# EAGLE board CT_schematic (EAGLE 7.6.0)

Size 100 x 80 mm. Coordinates in mm from the lower left corner, seen from the top.
Outline: 0,0 100,0 100,80 0,80 0,0
Copper layers (1*16): Top 0.035mm / dielectric 1.5mm / Bottom 0.035mm
Design rules "default": minimum track width 10mil, minimum drill 24mil, track to track 8mil, track to pad 8mil, pad to pad 8mil, via to via 8mil, smd to smd 8mil, copper to edge 40mil, drill to drill 8mil, minimum pad ring 10mil, minimum via ring 8mil, stop-mask expansion 4mil, vias tented up to drill 0mil, thermal gap 10mil

## Footprints (pad centres in the part's own frame; a part is rotated, then mirrored left to right if it is on the bottom)
C0603 = smd 0.8 x 0.8: 1 -0.762,0; 2 0.762,0
C0402 = smd 0.5 x 0.5: 1 -0.508,0; 2 0.508,0
C0805 = smd 1.2 x 1.3: 1 -1.016,0; 2 1.016,0
2220 = smd 1.85 x 5.5: 1 -2.55,0; 2 2.55,0
EXV-9H = smd 3.505 x 1.676: 1 -2.857,0; 2 2.857,0
L0603 = smd 0.8 x 0.8: 1 -0.762,0; 2 0.762,0
DR1040 = smd 1.6 x 3.2: 1 -4.458,0; 2 4.458,0
PJ-037B_PACKAGE = drill 3.7 square: 1 12,0 | drill 3.2 square: 2 6,0
R0603 = smd 0.8 x 0.8: 1 -0.762,0; 2 0.762,0
LQFP176 = smd 0.3 x 1.2: 1 -10.75,-12.75; 2 -10.25,-12.75; 3 -9.75,-12.75; 4 -9.25,-12.75; 5 -8.75,-12.75; 6 -8.25,-12.75; 7 -7.75,-12.75; 8 -7.25,-12.75; 9 -6.75,-12.75; 10 -6.25,-12.75; 11 -5.75,-12.75; 12 -5.25,-12.75; 13 -4.75,-12.75; 14 -4.25,-12.75; 15 -3.75,-12.75; 16 -3.25,-12.75; 17 -2.75,-12.75; 18 -2.25,-12.75; 19 -1.75,-12.75; 20 -1.25,-12.75; 21 -0.75,-12.75; 22 -0.25,-12.75; 23 0.25,-12.75; 24 0.75,-12.75; 25 1.25,-12.75; 26 1.75,-12.75; 27 2.25,-12.75; 28 2.75,-12.75; 29 3.25,-12.75; 30 3.75,-12.75; 31 4.25,-12.75; 32 4.75,-12.75; 33 5.25,-12.75; 34 5.75,-12.75; 35 6.25,-12.75; 36 6.75,-12.75; 37 7.25,-12.75; 38 7.75,-12.75; 39 8.25,-12.75; 40 8.75,-12.75; 41 9.25,-12.75; 42 9.75,-12.75; 43 10.25,-12.75; 44 10.75,-12.75; 89 10.75,12.75; 90 10.25,12.75; 91 9.75,12.75; 92 9.25,12.75; 93 8.75,12.75; 94 8.25,12.75; 95 7.75,12.75; 96 7.25,12.75; 97 6.75,12.75; 98 6.25,12.75; 99 5.75,12.75; 100 5.25,12.75; 101 4.75,12.75; 102 4.25,12.75; 103 3.75,12.75; 104 3.25,12.75; 105 2.75,12.75; 106 2.25,12.75; 107 1.75,12.75; 108 1.25,12.75; 109 0.75,12.75; 110 0.25,12.75; 111 -0.25,12.75; 112 -0.75,12.75; 113 -1.25,12.75; 114 -1.75,12.75; 115 -2.25,12.75; 116 -2.75,12.75; 117 -3.25,12.75; 118 -3.75,12.75; 119 -4.25,12.75; 120 -4.75,12.75; 121 -5.25,12.75; 122 -5.75,12.75; 123 -6.25,12.75; 124 -6.75,12.75; 125 -7.25,12.75; 126 -7.75,12.75; 127 -8.25,12.75; 128 -8.75,12.75; 129 -9.25,12.75; 130 -9.75,12.75; 131 -10.25,12.75; 132 -10.75,12.75 | smd 1.2 x 0.3: 45 12.75,-10.75; 46 12.75,-10.25; 47 12.75,-9.75; 48 12.75,-9.25; 49 12.75,-8.75; 50 12.75,-8.25; 51 12.75,-7.75; 52 12.75,-7.25; 53 12.75,-6.75; 54 12.75,-6.25; 55 12.75,-5.75; 56 12.75,-5.25; 57 12.75,-4.75; 58 12.75,-4.25; 59 12.75,-3.75; 60 12.75,-3.25; 61 12.75,-2.75; 62 12.75,-2.25; 63 12.75,-1.75; 64 12.75,-1.25; 65 12.75,-0.75; 66 12.75,-0.25; 67 12.75,0.25; 68 12.75,0.75; 69 12.75,1.25; 70 12.75,1.75; 71 12.75,2.25; 72 12.75,2.75; 73 12.75,3.25; 74 12.75,3.75; 75 12.75,4.25; 76 12.75,4.75; 77 12.75,5.25; 78 12.75,5.75; 79 12.75,6.25; 80 12.75,6.75; 81 12.75,7.25; 82 12.75,7.75; 83 12.75,8.25; 84 12.75,8.75; 85 12.75,9.25; 86 12.75,9.75; 87 12.75,10.25; 88 12.75,10.75; 133 -12.75,10.75; 134 -12.75,10.25; 135 -12.75,9.75; 136 -12.75,9.25; 137 -12.75,8.75; 138 -12.75,8.25; 139 -12.75,7.75; 140 -12.75,7.25; 141 -12.75,6.75; 142 -12.75,6.25; 143 -12.75,5.75; 144 -12.75,5.25; 145 -12.75,4.75; 146 -12.75,4.25; 147 -12.75,3.75; 148 -12.75,3.25; 149 -12.75,2.75; 150 -12.75,2.25; 151 -12.75,1.75; 152 -12.75,1.25; 153 -12.75,0.75; 154 -12.75,0.25; 155 -12.75,-0.25; 156 -12.75,-0.75; 157 -12.75,-1.25; 158 -12.75,-1.75; 159 -12.75,-2.25; 160 -12.75,-2.75; 161 -12.75,-3.25; 162 -12.75,-3.75; 163 -12.75,-4.25; 164 -12.75,-4.75; 165 -12.75,-5.25; 166 -12.75,-5.75; 167 -12.75,-6.25; 168 -12.75,-6.75; 169 -12.75,-7.25; 170 -12.75,-7.75; 171 -12.75,-8.25; 172 -12.75,-8.75; 173 -12.75,-9.25; 174 -12.75,-9.75; 175 -12.75,-10.25; 176 -12.75,-10.75
SAMTEC_FTSH-105-01-L-DV-K = smd 0.762 x 2.794: 1 -2.54,-2.032; 2 -2.54,2.032; 3 -1.27,-2.032; 4 -1.27,2.032; 5 0,-2.032; 6 0,2.032; 7 1.27,-2.032; 8 1.27,2.032; 9 2.54,-2.032; 10 2.54,2.032
DFN8-S = smd 0.6 x 0.4: 1 -2.69,1.905; 2 -2.69,0.635; 3 -2.69,-0.635; 4 -2.69,-1.905; 5 2.69,-1.905; 6 2.69,-0.635; 7 2.69,0.635; 8 2.69,1.905
ABLS-25.000MHZ-B2F-T = smd 5.6 x 2.8: 1 -3.81,0; 2 5.69,0
ASEK = smd 1.4 x 1: 1 -1.1,-0.8; 2 1.1,-0.8; 3 1.1,0.8; 4 -1.1,0.8
QFN-16_EP = smd 0.805 x 0.3: 1 -1.452,0.75; 2 -1.452,0.25; 3 -1.452,-0.25; 4 -1.452,-0.75; 9 1.452,-0.75; 10 1.452,-0.25; 11 1.452,0.25; 12 1.452,0.75 | smd 0.3 x 0.805: 5 -0.75,-1.452; 6 -0.25,-1.452; 7 0.25,-1.452; 8 0.75,-1.452; 13 0.75,1.452; 14 0.25,1.452; 15 -0.25,1.452; 16 -0.75,1.452 | smd 1.55 x 1.55: 17 0,0
SON-6 = smd 0.55 x 0.3: 1 -0.355,0.5 | smd 0.52 x 0.3: 2 -0.37,0; 3 -0.37,-0.5; 4 0.37,-0.5; 5 0.37,0; 6 0.37,0.5
SW_4-1437565-2 = smd 1.4 x 2.1: 1 -2.23,4.55; 2 -2.23,-4.55; 3 2.23,4.55; 4 2.23,-4.55
LGM67K-G1J2-24-Z = smd 0.8 x 1.4: A -2,0; C 0,0
NC7SZ125M5X = smd 1.3 x 0.7: 1 -1.3,0.95; 2 -1.3,0; 3 -1.3,-0.95; 4 1.3,-0.95; 5 1.3,0.95

## Placement (x,y rotation side)
C1  1e-06  [C0603]  -40.64,66.04 0 top  (outside the outline)
C2  1e-07  [C0603]  -44.45,66.04 0 top  (outside the outline)
C3  1e-07  [C0603]  -48.26,66.04 0 top  (outside the outline)
C4  1e-07  [C0603]  -52.07,66.04 0 top  (outside the outline)
C5  1e-07  [C0603]  -55.88,66.04 0 top  (outside the outline)
C6  1e-07  [C0603]  -59.69,66.04 0 top  (outside the outline)
C7  1e-07  [C0603]  -63.5,66.04 0 top  (outside the outline)
C8  1e-07  [C0603]  -67.31,66.04 0 top  (outside the outline)
C9  1e-07  [C0603]  -71.12,66.04 0 top  (outside the outline)
C10  1e-07  [C0603]  -15.24,71.12 0 top  (outside the outline)
C11  1e-07  [C0603]  -19.05,71.12 0 top  (outside the outline)
C12  1e-07  [C0603]  -22.86,71.12 0 top  (outside the outline)
C13  1e-07  [C0603]  -26.67,71.12 0 top  (outside the outline)
C14  1e-07  [C0603]  -30.48,71.12 0 top  (outside the outline)
C15  1e-07  [C0603]  -34.29,71.12 0 top  (outside the outline)
C16  1e-07  [C0603]  -38.1,71.12 0 top  (outside the outline)
C17  1e-07  [C0603]  -41.91,71.12 0 top  (outside the outline)
C18  4.7e-06  [C0603]  -29.21,66.04 0 top  (outside the outline)
C19  1e-07  [C0603]  -45.72,71.12 0 top  (outside the outline)
C20  1e-08  [C0603]  -49.53,71.12 0 top  (outside the outline)
C21  1e-06  [C0603]  -53.34,71.12 0 top  (outside the outline)
C22  1e-07  [C0603]  -57.15,71.12 0 top  (outside the outline)
C23  2.2e-06  [C0603]  -33.02,66.04 0 top  (outside the outline)
C24  2.2e-06  [C0603]  -36.83,66.04 0 top  (outside the outline)
C25  1e-11  [C0402]  -38.1,76.2 0 top  (outside the outline)
C26  1e-11  [C0402]  -41.91,76.2 0 top  (outside the outline)
C27  1e-07  [C0402]  -45.72,76.2 0 top  (outside the outline)
C28  1e-08  [C0402]  -49.53,76.2 0 top  (outside the outline)
C29  1e-08  [C0402]  -53.34,76.2 0 top  (outside the outline)
C30  1e-05  [C0805]  -62.23,53.34 0 top  (outside the outline)
C31  1e-06  [C0603]  -60.96,71.12 0 top  (outside the outline)
C32  1e-07  [C0402]  -57.15,76.2 0 top  (outside the outline)
C33  6.8e-05  [2220]  -16.51,45.72 0 top  (outside the outline)
C34  1e-07  [C0402]  -60.96,76.2 0 top  (outside the outline)
C35  0.0001  [EXV-9H]  -45.72,45.72 0 top  (outside the outline)
C36  0.0001  [EXV-9H]  -57.15,45.72 0 top  (outside the outline)
C37  1e-08  [C0402]  -64.77,76.2 0 top  (outside the outline)
C38  1e-08  [C0402]  -68.58,76.2 0 top  (outside the outline)
F1  240.0  [L0603]  -64.77,71.12 0 top  (outside the outline)
I1  5.2e-06  [DR1040]  -54.61,33.02 0 top  (outside the outline)
J1  PJ-037B  [PJ-037B_PACKAGE]  -27.94,34.29 0 top  (outside the outline)
R2  1000.0  [R0603]  -68.58,71.12 0 top  (outside the outline)
R7  4700.0  [R0603]  -72.39,71.12 0 top  (outside the outline)
R8  2200.0  [R0603]  -15.24,76.2 0 top  (outside the outline)
R10  2200.0  [R0603]  -19.05,76.2 0 top  (outside the outline)
R12  10000.0  [R0603]  -20.32,60.96 0 top  (outside the outline)
R13  10000.0  [R0603]  -25.4,60.96 0 top  (outside the outline)
R14  10000.0  [R0603]  -30.48,60.96 0 top  (outside the outline)
R15  10000.0  [R0603]  -35.56,60.96 0 top  (outside the outline)
R16  10000.0  [R0603]  -40.64,60.96 0 top  (outside the outline)
R17  10000.0  [R0603]  -45.72,60.96 0 top  (outside the outline)
R18  10000.0  [R0603]  -50.8,60.96 0 top  (outside the outline)
R19  5.0  [R0603]  -22.86,76.2 0 top  (outside the outline)
R20  10000.0  [R0603]  -55.88,60.96 0 top  (outside the outline)
R21  10000.0  [R0603]  -60.96,60.96 0 top  (outside the outline)
R22  10000.0  [R0603]  -66.04,60.96 0 top  (outside the outline)
R23  20000.0  [R0603]  -71.12,60.96 0 top  (outside the outline)
R24  91000.0  [R0603]  -15.24,66.04 0 top  (outside the outline)
R25  300000.0  [R0603]  -67.31,52.07 0 top  (outside the outline)
R26  10000.0  [R0603]  -20.32,66.04 0 top  (outside the outline)
R27  10000.0  [R0603]  -25.4,66.04 0 top  (outside the outline)
R28  9100.0  [R0603]  -26.67,76.2 0 top  (outside the outline)
R29  680000.0  [R0603]  -72.39,52.07 0 top  (outside the outline)
R30  120000.0  [R0603]  -15.24,60.96 0 top  (outside the outline)
U1  STM32F767IGT6  [LQFP176]  -26.67,13.97 0 top  (outside the outline)
U2  FTSH-105-01-L-DV-K  [SAMTEC_FTSH-105-01-L-DV-K]  -63.5,7.62 0 top  (outside the outline)
U3  24AA512-I/MF  [DFN8-S]  -69.85,33.02 0 top  (outside the outline)
U4  ABLS-25.000MHZ-B2F-T  [ABLS-25.000MHZ-B2F-T]  -26.67,54.61 0 top  (outside the outline)
U5  ASEK-32.768KHz-ECST  [ASEK]  -36.83,45.72 0 top  (outside the outline)
U6  LTC3601EUD#PBF  [QFN-16_EP]  -31.75,76.2 0 top  (outside the outline)
U7  TPS3895ADRYR  [SON-6]  -71.12,74.93 0 top  (outside the outline)
U8  4-1437565-2  [SW_4-1437565-2]  -44.45,34.29 0 top  (outside the outline)
U9  Q65110A2395  [LGM67K-G1J2-24-Z]  -38.1,53.34 0 top  (outside the outline)
U10  nc7sz125m5x  [NC7SZ125M5X]  -49.53,52.07 0 top  (outside the outline)
U11  nc7sz125m5x  [NC7SZ125M5X]  -55.88,52.07 0 top  (outside the outline)

## Library data of the parts
C1-C38 F1 I1 J1 R2 R7 R8 R10 R12-R30 U1-U11 = circuit_tree

## Nets
CLK_CRYSTAL_U1_29: C25.1 U1.29 U4.1
CLK_CRYSTAL_U1_30: C26.1 U1.30 U4.2
CLK_U1_9: U1.9 U5.3
GND: C1.2 C2.2 C3.2 C4.2 C5.2 C6.2 C7.2 C8.2 C9.2 C10.2 C11.2 C12.2 C13.2 C14.2 C15.2 C16.2 C17.2 C18.2 C19.2 C20.2 C21.2 C22.2 C23.2 C24.2 C25.2 C26.2 C27.2 C28.2 C29.2 C30.2 C31.2 C33.1 C33.2 C34.2 C35.2 C36.2 C37.2 C38.2 J1.2 R2.2 R12.2 R14.2 R18.2 R19.2 R21.2 R23.2 R25.2 R28.2 R30.2 U1.14 U1.22 U1.37 U1.61 U1.71 U1.90 U1.102 U1.113 U1.126 U1.135 U1.148 U1.158 U2.3 U2.5 U3.4 U3.7 U5.2 U6.1 U6.9 U6.17 U7.2 U9.C U10.2 U10.3 U11.1 U11.3
NET_U1_31: R7.1 U1.31 U11.4
NET_U1_39: C20.1 C21.1 F1.1 U1.38 U1.39
NET_U1_48: R14.1 U1.48
NET_U1_81: C23.1 U1.81
NET_U1_125: C24.1 U1.125
NET_U1_164: R8.1 U1.164 U3.6
NET_U1_165: R10.1 U1.165 U3.5
NET_U1_166: R12.1 U1.166
NET_U1_171: R13.1 U1.171
NET_U1_175: U9.A
NET_U1_176: U8.3 U8.4
NET_U2_9: R19.1 U2.9
NET_U3_1: R20.1 U3.1
NET_U3_2: R21.1 U3.2
NET_U3_3: R22.1 U3.3
NET_U6_3: C32.2 I1.1 U6.3 U6.4
NET_U6_6: C32.1 U6.6
NET_U6_7: C31.1 U6.7 U6.12
NET_U6_10: R25.1 U6.10
NET_U6_11: R23.1 R24.1 U6.11
NET_U6_14: U6.14
NET_U6_ATNET_3: I1.2 R24.2
NET_U7_1: R27.1 R28.1 U7.1
NET_U7_3: R29.2 R30.1 U7.3
NET_U7_4: R26.1 U7.4 U10.4 U11.2
NET_U8_1: R2.1 U8.1 U8.2
PROC_SYS_JTCK_SWCLK: R18.1 U1.137 U2.4
PROC_SYS_JTDI: R16.1 U1.138 U2.8
PROC_SYS_JTDO_SWO: U1.161 U2.6
PROC_SYS_JTMS_SWDIO: R17.1 U1.124 U2.2
RST_OUT_U2_JTAG_RST_B: R15.1 U2.10 U10.1
VCC_S1_9V2: C30.1 C35.1 C36.1 J1.1 U6.15 U6.16
VCC_TIER1_3V3: C1.1 C2.1 C3.1 C4.1 C5.1 C6.1 C7.1 C8.1 C9.1 C10.1 C11.1 C12.1 C13.1 C14.1 C15.1 C16.1 C17.1 C18.1 C19.1 C22.1 C27.1 C28.1 C29.1 C33.2 C34.1 C37.1 C38.1 F1.2 I1.2 R7.2 R8.2 R10.2 R13.2 R15.2 R16.2 R17.2 R20.2 R22.2 R24.2 R26.2 R27.2 R29.1 U1.6 U1.15 U1.23 U1.36 U1.49 U1.62 U1.72 U1.82 U1.91 U1.103 U1.114 U1.127 U1.136 U1.149 U1.159 U1.172 U2.1 U3.8 U5.4 U6.8 U7.6 U10.5 U11.5

## Tracks (layer width: path | path; a pad name or v marks a point on that pad's centre or on a via)
CLK_CRYSTAL_U1_29  (2 unrouted)
CLK_CRYSTAL_U1_30  (2 unrouted)
CLK_U1_9  (1 unrouted)
GND  (74 unrouted)
NET_U1_31  (2 unrouted)
NET_U1_39  (4 unrouted)
NET_U1_48  (1 unrouted)
NET_U1_81  (1 unrouted)
NET_U1_125  (1 unrouted)
NET_U1_164  (2 unrouted)
NET_U1_165  (2 unrouted)
NET_U1_166  (1 unrouted)
NET_U1_171  (1 unrouted)
NET_U1_176  (1 unrouted)
NET_U2_9  (1 unrouted)
NET_U3_1  (1 unrouted)
NET_U3_2  (1 unrouted)
NET_U3_3  (1 unrouted)
NET_U6_3  (3 unrouted)
NET_U6_6  (1 unrouted)
NET_U6_7  (2 unrouted)
NET_U6_10  (1 unrouted)
NET_U6_11  (2 unrouted)
NET_U6_ATNET_3  (1 unrouted)
NET_U7_1  (2 unrouted)
NET_U7_3  (2 unrouted)
NET_U7_4  (3 unrouted)
NET_U8_1  (2 unrouted)
PROC_SYS_JTCK_SWCLK  (2 unrouted)
PROC_SYS_JTDI  (2 unrouted)
PROC_SYS_JTDO_SWO  (1 unrouted)
PROC_SYS_JTMS_SWDIO  (2 unrouted)
RST_OUT_U2_JTAG_RST_B  (2 unrouted)
VCC_S1_9V2  (5 unrouted)
VCC_TIER1_3V3  (64 unrouted)